# Altium PCB Current_Sense_Board_V1.PcbDoc
Units mil, origin at the board's own origin, x right, y up, seen from the top; angles counter-clockwise.
Board outline 2677.17 x 2677.17 mil, 2 copper layers (Top Layer, Bottom Layer); 55 components, 30 nets, 223 pads, 61 vias.
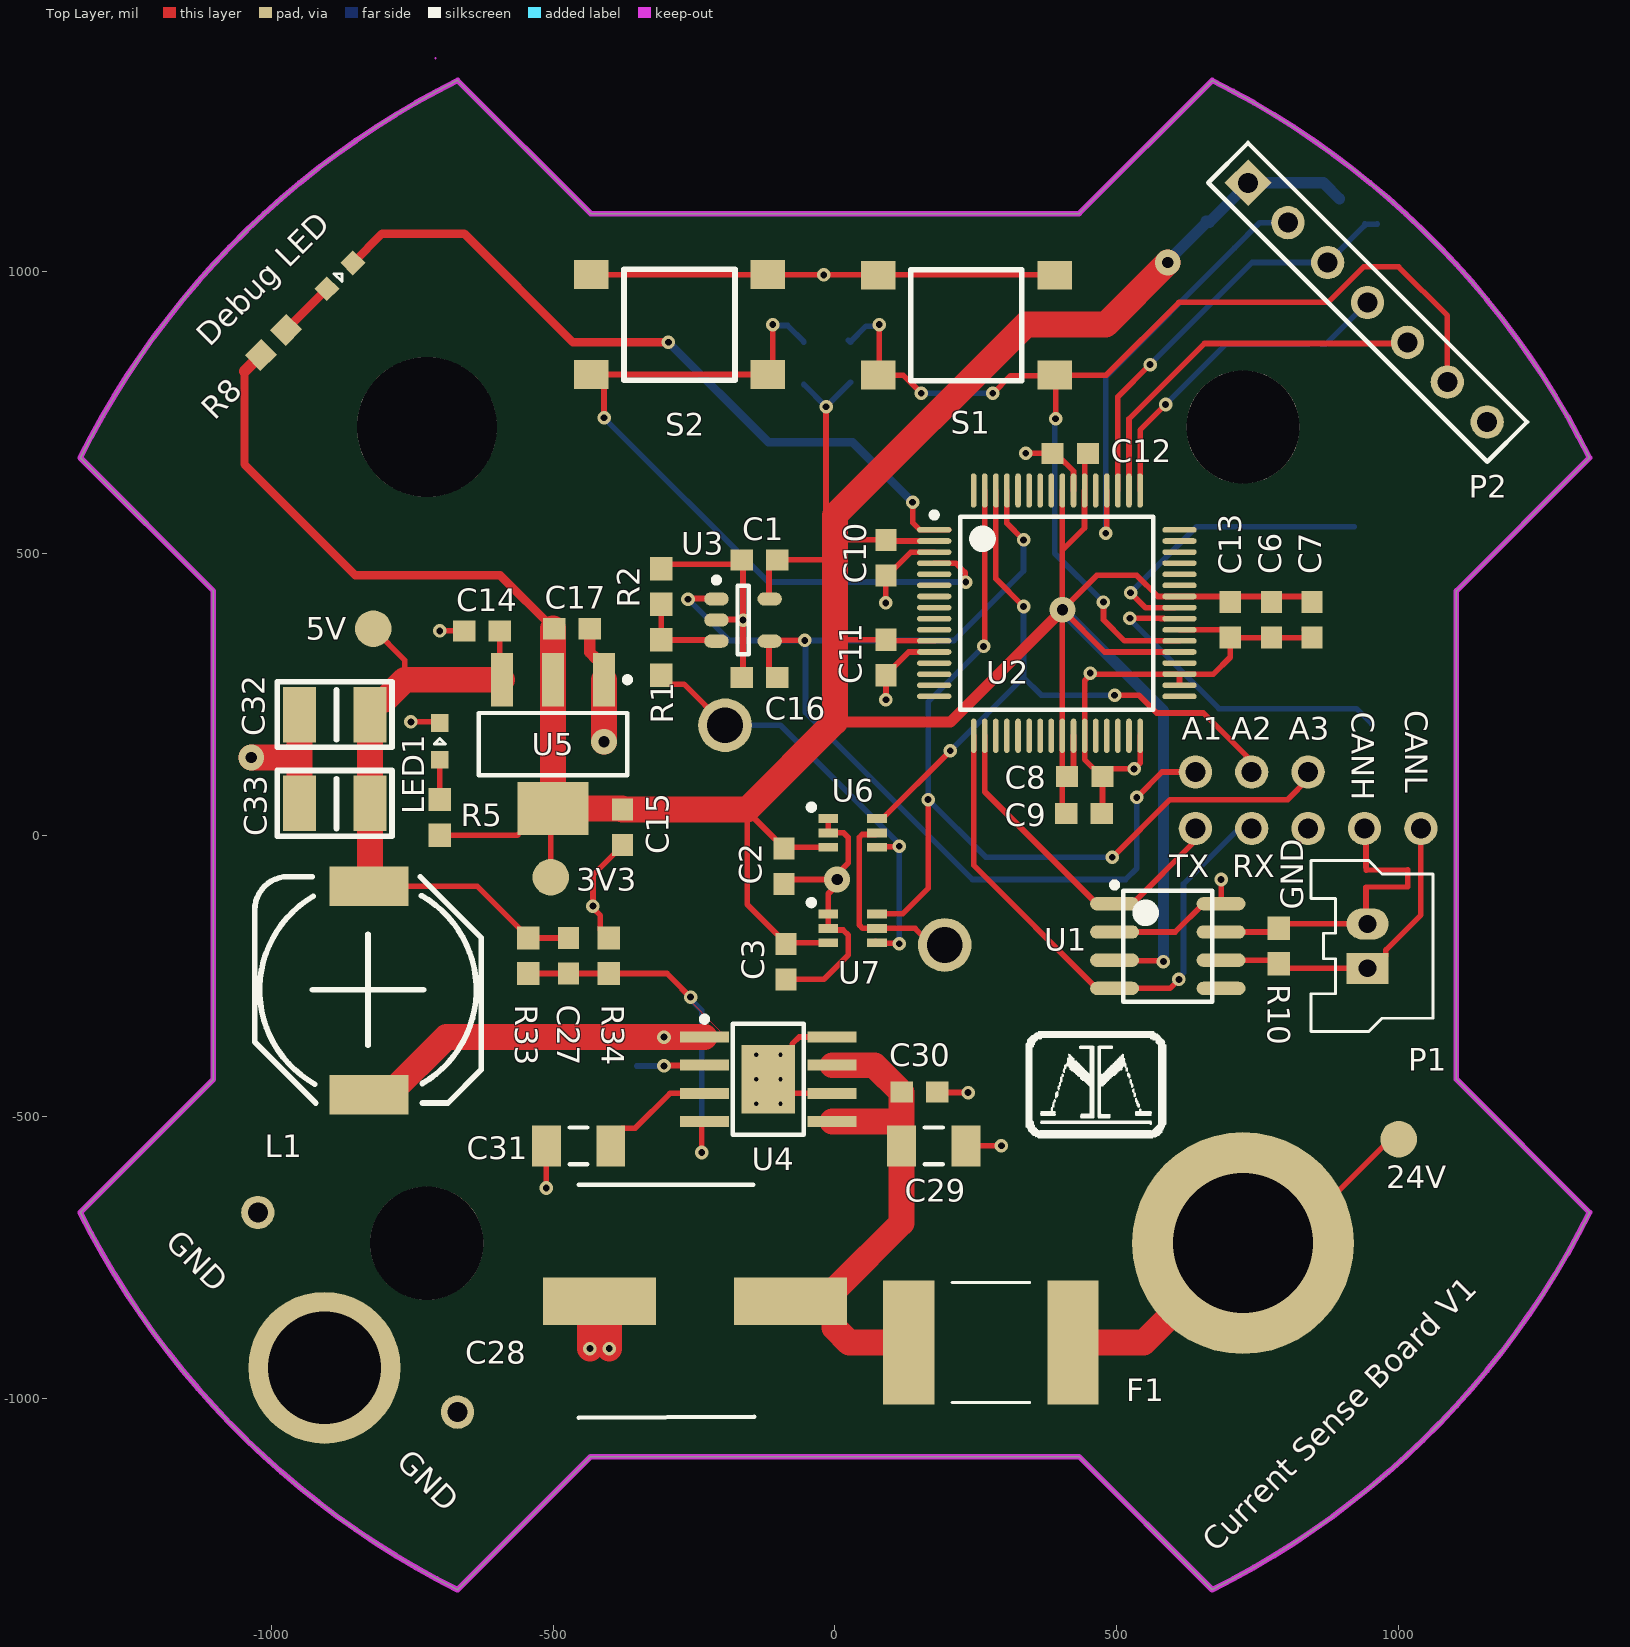
[diagram p0: Top Layer view]
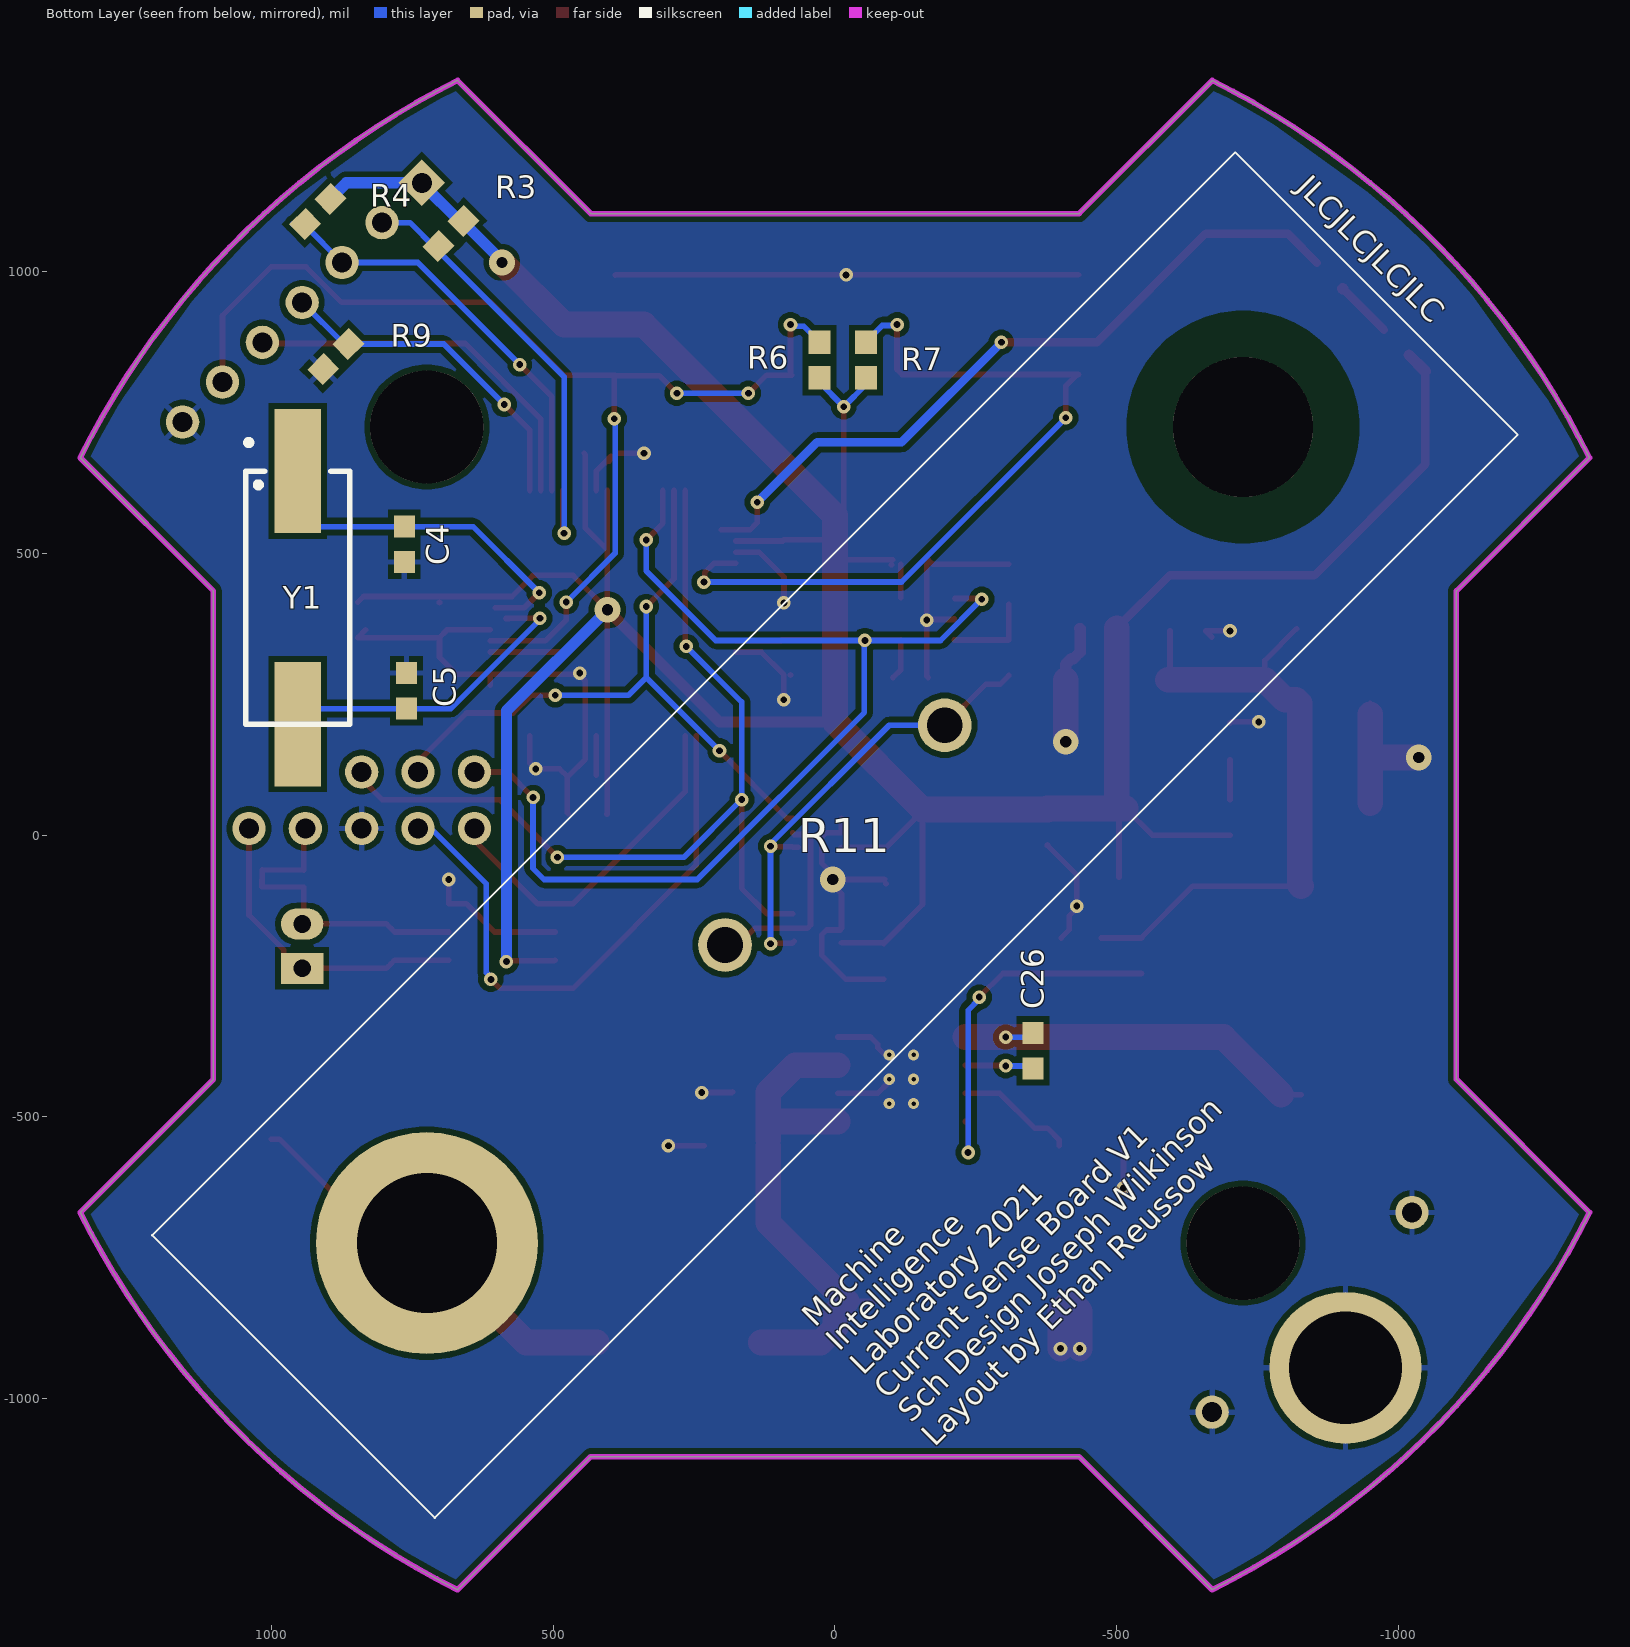
[diagram p1: Bottom Layer view, seen from below]

## Layer stack, top to bottom
Top Solder: solder mask 0.4, Solder Resist, Dk 3.5
Top Layer: signal copper 1.4
Dielectric 1: dielectric 12.6, FR-4, Dk 4.8
Bottom Layer: signal copper 1.4
Bottom Solder: solder mask 0.4, Solder Resist, Dk 3.5

## Board outline
-1338.58,-669.29 -1102.36,-433.07 -1102.36,433.07 -1338.58,669.29 cw(c0,0) -669.29,1338.58 -433.07,1102.36 433.07,1102.36 669.29,1338.58 cw(c0,0) 1338.58,669.29 1102.36,433.07 1102.36,-433.07 1338.58,-669.29 cw(c0,0) 669.29,-1338.58 433.07,-1102.36 -433.07,-1102.36 -669.29,-1338.58 cw(c0,0)

## Design rules (kind name [scope] priority, off if disabled: settings)
BoardOutlineClearance [All] p1: gap=7.87 ignorepadtopadclearanceinfootprint=FALSE
Clearance [All] p1: gap=10 ignorepadtopadclearanceinfootprint=FALSE except(0: Arc-Hole Track-Hole SMDPad-Hole THPad-Hole Via-Hole Fill-Hole Poly-Hole Region-Hole Text-Hole; 5: Track-Track SMDPad-SMDPad; 5.91: SMDPad-Text; 7.87: Track-SMDPad; 12.99: Track-THPad; 19.68: THPad-THPad)
HoleSize [All] p1: absolutevalues=TRUE maxlimit=248.03 minlimit=7.87 maxpercent=80.000 minpercent=20.000
HoleToHoleClearance [All] p1: gap=19.68 allowstackedmicrovias=TRUE
MinimumAnnularRing [All] p1: minimumring=5.12
MinimumSolderMaskSliver [All] p1: minsoldermaskwidth=0
PolygonConnect PolygonConnect_GND [InNet('GND')] p1: thpad.connectstyle=Relief thpad.reliefconductorwidth=10 thpad.reliefentries=4 thpad.polygonreliefangle="90 Angle" thpad.airgapwidth=10 smdpad.connectstyle=Relief smdpad.reliefconductorwidth=10 smdpad.reliefentries=4 smdpad.polygonreliefangle="90 Angle" smdpad.airgapwidth=10 via.connectstyle=Direct via.reliefconductorwidth=10 via.reliefentries=4 via.polygonreliefangle="90 Angle" via.airgapwidth=10
PolygonConnect PolygonConnect_NPTH [InNet('No Net')] p2: thpad.connectstyle=NoConnect thpad.reliefconductorwidth=10 thpad.reliefentries=4 thpad.polygonreliefangle="90 Angle" thpad.airgapwidth=393.7 smdpad.connectstyle=NoConnect smdpad.reliefconductorwidth=10 smdpad.reliefentries=4 smdpad.polygonreliefangle="90 Angle" smdpad.airgapwidth=10 via.connectstyle=NoConnect via.reliefconductorwidth=10 via.reliefentries=4 via.polygonreliefangle="90 Angle" via.airgapwidth=10
PolygonConnect PolygonConnect_ALL [All] p3: connectstyle=Relief reliefconductorwidth=10 reliefentries=4 polygonreliefangle="90 Angle" airgapwidth=10
RoutingVias [All] p1: holewidth=12.01 width=24.02 viastyle="Through Hole" minholewidth=7.87 minwidth=15.75 maxholewidth=248.03 maxwidth=496.06
SilkToSilkClearance [All] p1: silktosilkclearance=0
SilkToSolderMaskClearance [IsPad] p1 off: minsilkscreentomaskgap=10 clearancetoexposedcopper=TRUE
SolderMaskExpansion [All] p1: expansion=4 istentingtop=FALSE
UnRoutedNet [All] p1: checkbadconnections=TRUE
Width [All] p1: maxlimit=236.22 minlimit=5 preferedwidth=10 minimp=50.000000 maximp=50.000000 favimp=50.000000
24 further rules are at their usual default settings.

## Classes and differential pairs
component class TivaC: C1 C2 C3 C4 C5 C16 "Debug LED" LED1 P1 P2 R1 R2 R3 R4 R5 R6 R7 R8 R9 R10 S1 S2 U1 U2 U3 U6 U7 Y1
component class Power: C6 C7 C8 C9 C10 C11 C12 C13 C14 C15 C17 C26 C27 C28 C29 C30 C31 C32 C33 F1 L1 R33 R34 U4 U5

## Components (designator, comment, footprint, x,y, rotation, side; value= is the part's Value field where it differs from the comment)
C1 "Cap" CAPC0603 -133.86,488.19 r0 top value=1uF
C2 "Cap" CAPC0603 -90.55,-55.12 r270 top value=0.1uF
C3 "Cap" CAPC0603 -86.61,-224.41 r270 top value=0.1uF
C4 "Cap" CAPC0603 763.78,515.75 r270 bottom value=10pF
C5 "Cap" CAPC0603 759.84,255.91 r90 bottom value=10pF
C6 "Cap" CAPC0603 774.54,381.75 r270 top value=0.1uF
C7 "Cap" CAPC0603 846.2,381.75 r270 top value=0.1uF
C8 "Cap" CAPC0603 443.07,103.67 r0 top value=0.1uF
C9 "Cap" CAPC0603 441.74,37.99 r0 top value=0.1uF
C10 "Cap" CAPC0603 90.55,492.13 r270 top value=0.1uF
C11 "Cap" CAPC0603 90.55,314.96 r270 top value=0.1uF
C12 "Cap" CAPC0603 417.32,677.17 r180 top value=0.1uF
C13 "Cap" CAPC0603 701.25,381.75 r270 top value=1.0uF
C14 "Cap" CAPC0603 -625.98,362.2 r180 top value=1uF
C15 "Cap" CAPC0603 -377,13.9 r270 top value=1uF
C16 "Cap" CAPC0603 -133.86,279.53 r180 top value=100nF
C17 "Cap" CAPC0603 -466.48,366.02 r0 top value=1uF
C26 "Cap" CAPC0603 -351.49,-382.26 r90 bottom value=470nF
C27 "Cap" CAPC0603 -472.44,-213.92 r270 top value=75pF
C28 "MAL215097101E3" MAL215097101E3 -248.03,-826.77 r180 top value=100uF
C29 "Cap" CAPC1206 175.2,-551.18 r0 top value=10uF
C30 "Cap" CAPC0603 150.15,-455.67 r0 top value=100nF
C31 "Cap" CAPC1206 -454.72,-551.18 r180 top value=10uF
C32 "Cap" CAP1210 -823.71,213.79 r0 top value=47uF
C33 "Cap" CAP1210 -823.71,56.31 r0 top value=47uF
"Debug LED" "LED" LED0603 -877.95,992.13 r45 top (schematic designator LED2)
F1 "PTC Fuse" PTC7451X11N 276.64,-900.16 r180 top value=1.1A
GND "Hole_5.08mm" HOLE_5_08mm -905.51,-944.88 r0 top (schematic designator J2)
L1 "MSS1048-563MLB" MSS1048-563MLB -826.77,-275.59 r180 top value=56uH
LED1 "LED" LED0603 -700.79,166.34 r90 top
P1 "2-pin Vert Sherlock" MOLEX-HDR-1X2-SHERLOCK-VERT 944.88,-236.22 r270 top
P2 "Header 7" HDR1X7 732.75,1157.01 r315 top
R1 "Res" RES0603 -308.13,314.96 r90 top value=100k
R2 "Res" RES0603 -308.13,440.94 r90 top value=10k
R3 "Res" RES0603 681.1,1066.93 r315 bottom value=10k
R4 "Res" RES0603 917.32,1106.3 r135 bottom value=10k
R5 "Res" RES0603 -700.79,31.5 r90 top value=1k
R6 "Res" RES0603 27.56,842.52 r90 bottom value=10k
R7 "Res" RES0603 -55.12,842.52 r90 bottom value=10k
R8 "Res" RES0603 -996.06,874.02 r45 top value=1k
R9 "Res" RES0603 885.25,848.8 r315 bottom value=10k
R10 "Res" RES0603 787.4,-196.85 r90 top value=120
R11 "SH6918F500BPEP" SH6918F500BPEP 0,0 r315 bottom
R33 "Res" RES0603 -543.76,-213.92 r270 top value=40.2k
R34 "Res" RES0603 -401.28,-213.92 r90 top value=10k
S1 "Button" PTS645xxxxSMTR92 233.26,904.57 r180 top
S2 "Button" PTS645xxxxSMTR92 -275.59,905.51 r180 top
U1 "SN65HVD230" SOIC-8pin 590.55,-196.85 r0 top
U2 "TM4C123GH6PMT7R" TM4C123GH6PMT7R_L 393.7,393.7 r0 top value=Value
U3 "MCP6L01" MCP6L01R -162.91,381.47 r0 top
U4 "LMR23610ADDAR" LMR23610ADDAR -118.11,-433.07 r0 top
U5 "TLV1117LV30DCYR" SOT23-4N -500,161.42 r270 top
U6 "INA190" "SC70 (DCK)" -11.81,29.53 r0 top
U7 "INA190" "SC70 (DCK)" -11.81,-139.76 r0 top
Y1 "ABLS2-12.000MHZ-D4Y-T" HC49/US 952.76,421.26 r270 bottom

## Footprints (in the part's own frame and the unit in brackets; to place one, negate y for a bottom-side part, rotate by r counter-clockwise, add the part's x,y. Pads: shape width x height; smd on the part's side, far side on the other; paste and mask are expansions set on the pad)
CAP1210 [mm]
  rect 1.5x2.5 smd: 1(-0.02,0) 2(-3.2,0)
  silkscreen extent -4.2,-1.48 0.97,1.48, body extent -3.22,-1.25 0,1.26, height 2.5
CAPC0603 [mm] "Chip Capacitor, 2-Leads, Body 1.60x0.80mm, IPC Medium Density"
  rect 1x0.95 smd: 1(-0.8,0) 2(0.8,0)
  body extent -0.88,-0.48 0.87,0.48, height 0.8
CAPC1206 [mm] "Chip Capacitor, 2-Leads, Body 3.20x1.60mm, IPC Medium Density"
  rect 1.3x1.85 smd: 1(-1.45,0) 2(1.45,0)
  silkscreen extent -0.4,-0.82 0.4,0.82, body extent -1.7,-0.9 1.7,0.9, height 1.8
HC49/US [mm]
  rect 5.6x2.1 smd: 1(-5.7,0) 2(5.7,0)
  silkscreen extent -7.11,-2.35 5.7,2.35, body extent -6.35,-2.35 6.35,2.35, height 3.16
HDR1X7 [mm] "Connector; Header; 7 Position"
  rect 1.5x1.5 hole 0.9: 1(0,0)
  round 1.5 hole 0.9: 2(2.54,0) 3(5.08,0) 4(7.62,0) 5(10.16,0) 6(12.7,0) 7(15.24,0)
  silkscreen extent -1.27,-1.27 16.51,1.27
HOLE_5_08mm [mm]
  round 6.85 hole 5.08: 1(0,0)
LED0603 [mm] "Chip LED, 2-Leads, Body 1.60x0.80mm, IPC Medium Density"
  rect 0.8x0.8 smd: A(-0.825,0) C(0.825,0)
  silkscreen extent -0.13,-0.25 0.12,0.25, body extent -0.88,-0.48 0.88,0.47, height 0.8
LMR23610ADDAR [mm] "IC REG BUCK ADJ 1A SYNC 8SOPWRPD"
  rect 2.2x0.5 smd: 1(-2.875,1.905) 2(-2.875,0.635) 3(-2.875,-0.635) 4(-2.875,-1.905) 5(2.875,-1.905) 6(2.875,-0.635) 7(2.875,0.635) 8(2.875,1.905)
  rect 2.4x3.1 smd: 9(0,0)
  silkscreen extent -3,-2.5 1.6,2.83, body extent -2,-2.5 2,2.5, height 1.7
MAL215097101E3 [mm]
  rect 5.1x2.15 smd: 1(-4.3,0) 2(4.3,0)
  silkscreen extent -2.67,-5.25 5.25,5.25, body extent -6.05,-5.25 6.05,5.25, height 10.5
MCP6L01R [mm] "SOT23, 5-Leads, Body 2.90x2.70mm, Pitch 0.95mm, IPC Medium Density"
  oval 1.1x0.6 smd: 1(-1.2,0.95) 2(-1.2,0) 3(-1.2,-0.95) 4(1.2,-0.95) 5(1.2,0.95)
  silkscreen extent -1.32,-1.55 0.25,1.92, body extent -0.9,-1.55 0.9,1.55, height 1.45
MOLEX-HDR-1X2-SHERLOCK-VERT [mm]
  rect 1.397x1.905 hole 0.8: 1(0,0)
  oval 1.397x1.905 hole 0.8: 2(-2,0)
  silkscreen extent -4.85,-2.55 2.85,2.95, body extent -4.87,-2.59 2.83,2.96, height 8.5
MSS1048-563MLB [mm] "FIXED IND 56UH 1.7A 126 MOHM"
  rect 3.56x1.78 smd: 1(0,4.7) 2(0,-4.7)
  silkscreen extent -5.06,-5.13 5.14,5.07, body extent -5.1,-5.15 5.1,5.15, height 5
PTC7451X11N [mm] "Chip PTC, 2920, 7351 metric 2-Leads, Body 7.36x5.12mm, IPC Medium Density"
  rect 2.3x5.6 smd: 1(-3.7,0) 2(3.7,0)
  silkscreen extent -1.75,-2.7 1.75,2.7, body extent -3.99,-2.72 3.99,2.72, height 1.15
PTS645xxxxSMTR92 [mm] "PTS645 Series SMT 6 mm Tactile Switch"
  rect 1.555x1.3 smd: A(-3.975,2.25) A(3.975,2.25) B(-3.975,-2.25) B(3.975,-2.25)
  silkscreen extent -2.5,-2.5 2.5,2.5, body extent -3,-3 3,3, height 4.5
RES0603 [mm] "Chip Resistor, 2-Leads, Body 1.60x0.80mm, IPC Medium Density"
  rect 1.05x1 smd: 1(-0.8,0) 2(0.8,0)
  body extent -0.88,-0.48 0.87,0.47, height 0.8
"SC70 (DCK)" [mm] "6 pin"
  rect 0.9x0.4 smd mask+0.05: 1(0,0) 2(0,-0.65) 3(0,-1.3) 4(2.2,-1.3) 5(2.2,-0.65) 6(2.2,0)
  silkscreen extent -0.89,0.38 -0.64,0.63
SH6918F500BPEP [mm]
  round 2.415 hole 1.61: 1(-7,0) 2(7,0)
  round 6.3 hole 6.3 unplated: MH1(-26,0)
  round 10 hole 6.3: MH2(26,0)
  silkscreen extent -34.5,-9 34.5,9, body extent -34.5,-9 34.5,9, height 3.3
SOIC-8pin [mm] "For 296-1345-1-ND"
  oval 2.2x0.6 smd: 1(-2.4,1.905) 2(-2.4,0.635) 3(-2.4,-0.635) 4(-2.4,-1.905) 5(2.4,-1.905) 6(2.4,-0.635) 7(2.4,0.635) 8(2.4,1.905)
  silkscreen extent -2.52,-2.5 2,2.88, body extent -2,-2.5 2,2.5, height 1.75
SOT23-4N [mm] "SOT223, 4-Leads, Body 6.50x7.00mm (avg), Pitch 2.30mm, IPC Medium Density"
  rect 2.4x1 smd: 1(-2.9,2.3) 2(-2.9,0) 3(-2.9,-2.3)
  rect 2.4x3.2 smd: 4(2.9,0)
  silkscreen extent -3.02,-3.35 1.4,3.48, body extent -1.85,-3.35 1.85,3.35, height 1.7
TM4C123GH6PMT7R_L [mm]
  oval 1.55x0.25 smd paste-0.102 mask+0.051: 1(-5.525,3.75) 2(-5.525,3.25) 3(-5.525,2.75) 4(-5.525,2.25) 5(-5.525,1.75) 6(-5.525,1.25) 7(-5.525,0.75) 8(-5.525,0.25) 9(-5.525,-0.25) 10(-5.525,-0.75) 11(-5.525,-1.25) 12(-5.525,-1.75) 13(-5.525,-2.25) 14(-5.525,-2.75) 15(-5.525,-3.25) 16(-5.525,-3.75) 33(5.525,-3.75) 34(5.525,-3.25) 35(5.525,-2.75) 36(5.525,-2.25) 37(5.525,-1.75) 38(5.525,-1.25) 39(5.525,-0.75) 40(5.525,-0.25) 41(5.525,0.25) 42(5.525,0.75) 43(5.525,1.25) 44(5.525,1.75) 45(5.525,2.25) 46(5.525,2.75) 47(5.525,3.25) 48(5.525,3.75)
  oval 0.25x1.55 smd paste-0.102 mask+0.051: 17(-3.75,-5.525) 18(-3.25,-5.525) 19(-2.75,-5.525) 20(-2.25,-5.525) 21(-1.75,-5.525) 22(-1.25,-5.525) 23(-0.75,-5.525) 24(-0.25,-5.525) 25(0.25,-5.525) 26(0.75,-5.525) 27(1.25,-5.525) 28(1.75,-5.525) 29(2.25,-5.525) 30(2.75,-5.525) 31(3.25,-5.525) 32(3.75,-5.525) 49(3.75,5.525) 50(3.25,5.525) 51(2.75,5.525) 52(2.25,5.525) 53(1.75,5.525) 54(1.25,5.525) 55(0.75,5.525) 56(0.25,5.525) 57(-0.25,5.525) 58(-0.75,5.525) 59(-1.25,5.525) 60(-1.75,5.525) 61(-2.25,5.525) 62(-2.75,5.525) 63(-3.25,5.525) 64(-3.75,5.525)
  silkscreen extent -5.65,-4.35 4.35,4.55, body extent 0,0 0.25,0.25, height 0.25

## Part data
C1 C2 C3 C4 C5 C6 C7 C8 C9 C10 C11 C12 C13 C14 C15 C16 C17 C30: Supplier Part Number 1=1276-1000-1-ND, Supplier 1=Digi-Key
C32 C33: Supplier Part Number 1=490-6538-1-ND, Supplier 1=Digi-Key
"Debug LED": Color=Blue, Supplier Part Number 1=754-1122-1-ND, Supplier 1=Digi-Key
F1: library part PTC_Fuse, Supplier Part Number 1=507-1744-1-ND, Supplier 1=Digi-Key
L1: "FIXED IND 56UH 1.7A 126 MOHM", Manufacturer 1=Coilcraft, ComponentLink1Description="Web Site", ComponentLink1URL=https://www.coilcraft.com/mss1048.cfm, Manufacturer Part Number 1=MSS1048-563MLB, Supplier 1=Coilcraft, Supplier Part Number 1=MSS1048-563MLB
LED1: Color=Green, Supplier Part Number 1=754-1122-1-ND, Supplier 1=Digi-Key
P1: library part MOLEX-HDR-1x2-SHERLOCK_VERT, "Header, Molex, 2mm Pitch Sherlock Header, Single Row, Vertical, 2 Circuits, Length 3.3mm, 0353620250"
P2: "Header, 7-Pin", LatestRevisionDate=17-Jul-2002, LatestRevisionNote="Re-released for DXP Platform.", Publisher="Altium Limited"
R1 R2 R3 R4 R5 R6 R7 R8 R9 R10 R33 R34: Supplier Part Number 1=RMCF0603JT10K0CT-ND, Supplier 1=Digi-Key
R11: "Copper bus bar with shunt resistor integrated", Manufacturer_Name=Ohmite, Mouser Part Number=588-SH6918F500BPEP, Height=3.2mm, Manufacturer_Part_Number=SH6918F500BPEP, Mouser Price/Stock=https://www.mouser.co.uk/ProductDetail/Ohmite/SH6918F500BPEP?qs=GedFDFLaBXHzBT0hI2BMgQ%3D%3D
S1 S2: "SPST Button", Supplier Part Number 1=CKN9087CT-ND, Supplier 1=Digi-Key
U1: "3.3V CAN Bus Transceiver"
U2: "Imported", Alternate_PartNumber=TM4C123GH6PMT, Manufacturer="Texas Instruments", PartNumber=TM4C123GH6PMTR, CompType=IC, MountType=SMT, PackageReference=PM0064A, PIN_COUNT=64, RefDes=RefDes, RoHS=Y, TYPE=TYPE
U3: "Op Amp Rail-to-Rail 1Mhz", Supplier Part Number 1=MCP6L01T-E/OTCT-ND, Supplier 1=Digi-Key
U4: "IC REG BUCK ADJ 1A SYNC 8SOPWRPD", Manufacturer 1="Texas Instruments", Supplier Part Number 1=296-47267-1-ND, ComponentLink1Description=Datasheet, ComponentLink1URL=http://www.ti.com/lit/ds/symlink/lmr23610.pdf, ComponentLink2Description="Web Site", ComponentLink2URL=http://www.ti.com/product/LMR23610/description, Manufacturer Part Number 1=LMR23610ADDAR, Supplier 1=Digi-Key
Y1: "12MHz ±30ppm Crystal 18pF 50 Ohm -40°C ~ 85°C Surface Mount HC49/US", Supplier Part Number 1=535-9869-1-ND, Supplier 1=Digi-Key
C26 C27 C29 C31: Supplier 1=Digi-Key

## Free pads (board coordinates)
  round 59.06 hole 35.43: 10(-1023.62,-669.29) 11(-669.29,-1023.62) 19(1039.37,11.81) 20(939.37,11.81) 21(839.37,11.81) 21(839.37,111.81) 22(739.37,11.81) 23(639.37,11.81) 25(639.37,111.81) 26(739.37,111.81)
  round 64.75 smd: 12(-818.9,366.14) 12(-503.94,-74.8) 12(1000,-539.37)
  round 200.79 hole 200.79 unplated: MH2(723.81,723.81) MH3(-723.81,-723.81)

## Via types
v1: diameter 24.02, hole 12.01, Top Layer to Bottom Layer, 39 vias
v2: diameter 24, hole 12, Top Layer to Bottom Layer, 11 vias
v3: diameter 19.68, hole 7.87, Top Layer to Bottom Layer, 6 vias
v4: diameter 45.67, hole 20, Top Layer to Bottom Layer, 5 vias

## Nets (pads, with @x,y where several pads share a name; then routed paths per layer and width w, separated by ;. In a path a pad name is that pad's centre, name@x,y a point inside that pad or via, vN(x,y) a via of type N, cw(c..) or ccw(c..) an arc to the next point about the centre after c; other vN are vias at no path point)
3V3: C1.2 C2.1 C3.1 C6.1 C7.1 C8.1 C9.1 C10.1 C11.1 C12.1 C13.1 C15.1 C17.1 P2.1 pad.12@-503.94,-74.8 R3.1 R4.2 R5.1 R6.1 R7.1 R8.1 U1.3 U2.2 U2.11 U2.25 U2.26 U2.37 U2.42 U2.54 U2.56 U3.5 U5.2 U5.4 U6.3 U7.3 | length 7837.3
  Top Layer w10: R5.1 -562.99,0 U5.4@-515.75,47.24 ; pad.12@-503.94,-74.8 -503.94,43.31 U5.4 ; -155.39,45.4 -155.39,42.2 ; U3.5@-117,420.98 C1.2@-117,480.31 ; C1.2 -4.21,488.19 -3.99,488.41 ; C1.2@-100.94,479.38 C1.2@-99.95,479.38 ; v1(-15.75,759.84) -15.75,538.16 -1.49,523.9 ; U7.3 -84.65,-190.94 C3.1 -86.61,-191.93 -155.39,-123.15 -155.39,42.2 ; U6.3 -91.54,-21.65 -155.39,42.2 ; -0.99,524.4 -0.21,523.62 0,523.62 C10.1 92.52,521.65 U2.2 ; 0,336.61 9.84,346.46 C11.1 ; C11.1@93.81,346.22 95.54,344.49 U2.11 ; U2.56 403.54,505.41 ; C9.1@404.39,36.99 403.54,37.84 U2.25 v4(403.54,399.61) ; U2.26 423.23,106.05 C8.1@423.34,105.94 ; C12.1@444.88,677.17 442.91,675.2 U2.54 442.83,611.14 442.83,544.7 403.54,505.41 ; U1.3 497.34,-223.13 581.4,-223.13 v1(582.68,-224.41) ; U2.37 478.35,324.8 v4(403.54,399.61) ; C13.1@701.25,412.26 C13.1 ; C7.1 836.22,423.23 572.83,423.23 535.43,460.63 464.57,460.63 v4(403.54,399.61) ; v4(403.54,399.61) 403.54,505.41
  Top Layer w15: -1047.24,822.83 -1047.24,657.48 -850.39,460.63 -593.57,460.63 C17.1@-500,367.06
  Top Layer w20: -1047.24,822.83 R8.1 ; 0,200.79 204.72,200.79 v4(403.54,399.61)
  Top Layer w45.67: U5.4@-515.75,47.24 U5.4 ; C17.1@-500,367.06 U5.2 U5.4 ; C15.1 -155.39,45.4 0,200.79 0,336.61 0,523.62 0,566.93 338.58,905.51 480.31,905.51 v4(590.55,1015.75) ; C15.1@-377,47.24 U5.4
  Bottom Layer w10: R7.1@-55.12,799.21 v1(-15.75,759.84) R6.1@27.56,803.15
  Bottom Layer w20: v4(403.54,399.61) 582.68,220.47 v1(582.68,-224.41) ; v4(590.55,1015.75) 590.55,1018.33 658.83,1086.61 R3.1 ; R3.1@664.28,1087.26 732.75,1155.73 P2.1 866.61,1157.01 R4.2
5V: C14.1 C27.1 C32.1 C33.1 L1.2 pad.12@-818.9,366.14 R33.1 U5.3 | length 1171.4
  Top Layer w10: L1.2 -634.65,-90.55 -543.76,-181.44 R33.1 C27.1 ; pad.12@-818.9,366.14 -762.7,309.94 -762.7,275.59 ; C14.1 -594.49,279.53 U5.3
  Top Layer w45.67: L1.2 -824.5,-88.28 C33.1 C32.1 -824.5,233.47 -817.81,240.16 -798.12,240.16 -762.7,275.59 U5.3
24V: F1.1 pad.12@1000,-539.37 R11.MH2 | length 727.1
  Top Layer w10: R11.MH2 800.74,-723.81 985.18,-539.37 pad.12@1000,-539.37
  Top Layer w45.67: F1.1 547.46,-900.16 R11.MH2
ADC_IN1: C16.1 pad.25 U2.61 U3.1 U3.4 | length 2114
  Top Layer w10: v1(-260.55,418.51) -259.31,419.74 U3.1@-212.72,419.74 ; C16.1 -103.3,279.53 -117,293.23 -117,346.18 -116.52,345.7 -53.82,345.7 v1(-53.34,345.22) ; U2.61 305.12,553.15 v1(334.65,523.62) ; v1(535.43,66.93) 580.31,111.81 pad.25
  Bottom Layer w10: v1(-260.55,418.51) -187.26,345.22 v1(-53.34,345.22) ; v1@-51.1,342.98 v1@-52.22,344.1 ; v1(334.65,523.62) 334.65,468.5 211.36,345.22 v1(-53.34,345.22) ; v1(535.43,66.93) 535.43,-59.06 515.75,-78.74 244.09,-78.74 -52.22,217.57 v1@-52.22,344.1 ; v1(-53.34,345.22) v1@-52.22,344.1
ADC_IN2: pad.26 U2.62 U6.6 | length 1204.5
  Top Layer w10: U6.6 84.65,29.53 v1(204.72,149.61) ; U2.62 285.43,454.72 v1(334.65,405.51) v1@331.96,402.83 ; v1(496.06,248.03) 539.37,248.03 570.87,216.54 653.54,216.54 729.98,140.09 729.98,121.2 pad.26
  Bottom Layer w10: v1(204.72,149.61) 334.65,279.53 ; v1(334.65,405.51) 334.65,279.53 ; v1(496.06,248.03) 366.14,248.03 334.65,279.53
ADC_IN3: pad.21@839.37,111.81 U2.63 U7.6 | length 1643
  Top Layer w10: U7.6 120.08,-139.76 165.35,-94.49 v1(165.35,62.99) ; v1(263.78,334.65) 265.67,336.54 265.67,611.14 U2.63 ; v1(492.13,-39.37) 594.49,62.99 803.15,62.99 839.37,99.21 pad.21@839.37,111.81
  Bottom Layer w10: v1(263.78,334.65) 165.35,236.22 v1(165.35,62.99) 267.72,-39.37 v1(492.13,-39.37)
CAN_RX: pad.22 U1.4 U2.17 | length 1025.4
  Top Layer w10: U2.17 246.06,-53.35 464.57,-271.85 U1.4 594.29,-271.85 v1(610.24,-255.91)
  Bottom Layer w10: v1(610.24,-255.91) 610.24,-252.11 618.29,-244.06 618.29,-86.43 716.54,11.81 pad.22
CAN_TX: pad.23 U1.1 U2.18 | length 603
  Top Layer w10: U2.18 265.75,76.97 464.57,-121.85 U1.1 527.56,-121.85 637.8,-11.61 pad.23@637.8,-7.87
CANH: P1.2 pad.20 R10.2 U1.7 | length 593.3
  Top Layer w10: U1.7 780.91,-171.85 R10.2 795.28,-157.48 P1.2 942.13,-154.72 942.13,-122.22 942.13,-92.3 1016.26,-91.76 1016.04,-61.76 942.17,-62.3 942.13,-56.44 942.13,-51.44 942.13,16.93 pad.20@939.37,19.69
CANL: P1.1 pad.19 R10.1 U1.6 | length 543.1
  Top Layer w10: U1.6 780.91,-221.85 R10.1 795.28,-236.22 P1.1 954.88,-236.22 977.38,-213.72 977.38,-203.72 1039.37,-141.73 pad.19@1039.37,-3.94
DBG_LED_n: "Debug LED.C" U2.1 | length 1317
  Top Layer w10: v1(137.8,590.55) 137.8,554.29 150.75,541.34 U2.1 U2.1@201.61,541.34
  Top Layer w15: -854.99,1015.09 -803.15,1066.93 -657.48,1066.93 -464.57,874.02 v1(-295.28,874.02)
  Bottom Layer w15: v1(-295.28,874.02) -118.11,696.85 31.5,696.85 v1(137.8,590.55)
DBG_SW_n: R7.2 S2.A U2.4 | length 1400.9
  Top Layer w10: S2.A@-432.09,816.93 S2.A@-430.04,816.93 ; v1(-409.45,740.16) -409.45,796.34 S2.A@-430.04,816.93 ; v1(-110.24,905.51) -110.24,825.79 -119.09,816.93 S2.A@-430.04,816.93 ; U2.4 214.57,482.28 231.06,465.79 231.06,450.04 v1(232.28,448.82)
  Bottom Layer w10: v1(-409.45,740.16) -118.11,448.82 v1(232.28,448.82) ; v1(-110.24,905.51) -108.55,903.83 -83.95,903.83 -55.12,875 R7.2
GND: C1.1 C2.2 C3.2 C4.2 C5.2 C6.2 C7.2 C8.2 C9.2 C10.2 C11.2 C12.2 C13.2 C14.2 C15.2 C16.2 C17.2 C28.2 C29.2 C30.2 C31.2 C32.2 C33.2 GND.1 LED1.C P2.7 pad.10 pad.11 pad.21@839.37,11.81 R2.2 R9.2 R34.2 S1.B S2.B U1.2 U1.8 U2.3 U2.12 U2.27 U2.32 U2.34 U2.35 U2.39 U2.55 U3.2 U4.6 U4.8 U4.9 U5.1 U6.1 U6.2 U7.1 U7.2 | length 4789.3
  Top Layer w10: C32.2 C32.2@-949.7,233.47 ; v1(-751.97,200.79) -702.76,200.79 LED1.C ; v1(-700.79,362.2) C14.2 C14.2@-668.29,351.39 ; v2(-511.81,-625.98) C31.2 ; S2.B@-432.09,994.09 -119.09,994.09 388.81,994.09 S1.B@389.76,993.15 ; R34.2 -415.97,-167.74 -415.97,-142.94 -429.13,-129.77 v2(-429.13,-125.98) -429.13,-70.71 -377,-18.58 C15.2 ; R2.2@-308.13,480.31 -173.23,480.31 C1.1 ; U3.2@-211.49,383.58 -210.43,382.53 -163.97,382.53 v2(-162.91,381.47) ; C16.2 -162.91,281.97 v2(-162.91,381.47) ; C1.1@-162.91,479.35 v2(-162.91,381.47) ; v3(-96.46,-433.07) -96.46,-437.48 -75.87,-458.07 U4.6 ; v3(-96.46,-389.76) -88.58,-389.76 -75.87,-377.05 -75.87,-370.71 -63.23,-358.07 U4.8 ; C2.2@-87.93,-78.37 -87.56,-78.74 v4(3.94,-78.74) ; C3.2 -19.69,-255.91 23.62,-212.6 23.62,-177.17 14.69,-168.23 -8.94,-168.23 U7.2 U7.1 -11.81,-104.14 3.94,-88.39 v4(3.94,-78.74) ; U6.1 U6.2 15.75,3.94 23.62,-3.94 23.62,-49.4 3.94,-69.09 v4(3.94,-78.74) ; C11.2@78.74,283.46 C11.2@78.74,284.45 ; v1(90.38,411.79) 90.38,457.5 134.84,501.97 U2.3 ; v1(90.55,240.16) C11.2 90.55,284.45 130.91,324.8 U2.12 ; C30.2 182.66,-456.69 v2(236.22,-456.69) ; C29.2 v2(295.28,-551.18) ; v1(338.58,677.17) C12.2 386.81,677.17 C12.2@400.51,663.46 ; C12.2@396.81,671.98 423.23,645.56 U2.55 ; C9.2 474.57,39.32 C8.2 ; U1.2 603.54,-171.85 653.54,-121.85 U1.8 v1(685.04,-78.74) ; U2.32 541.34,127.95 v1(530.76,117.37) 488.27,117.37 C8.2 ; U2.34 U2.35 ; U2.39 687.55,364.17 701.25,350.47 C13.2 ; C7.2@832.5,364.17 846.2,350.47 C7.2 C6.2 C13.2 ; C8.2 473.58,103.67 442.91,134.34 U2.27 442.91,273.77 452.76,283.61 v1(452.76,287.4) 454.65,285.51 611.14,285.51 U2.35 ; U2.35 671.26,285.43 701.25,315.42 C13.2
  Top Layer w20: C17.2@-434,366.02 C17.2 -434.99,324.55 -423.27,312.83 -419.13,312.83 -409.45,303.15 U5.1
  Top Layer w45.67: v4(-1035.43,137.8) -952.45,137.8 -949.7,135.05 ; C33.2 -949.7,135.05 ; C32.2 -949.7,135.05 ; v1(-434.47,-910.85) -434.47,-843.92 C28.2 -400.18,-843.92 v1(-400.18,-910.85) ; v4(-409.45,165.35) U5.1
  other v1: -19.74,993.66
  other v3: -139.76,-476.38 -96.46,-476.38 -139.76,-433.07 -139.76,-389.76
NetC26_1: C26.1 U4.2 | length 120.8
  Top Layer w10: v2(-303.15,-409.45) -302.46,-408.76 -231.99,-408.76 U4.2
  Bottom Layer w10: C26.1@-351.49,-409.45 v2(-303.15,-409.45)
NetC26_2: C26.2 L1.1 U4.1 | length 686.3
  Top Layer w10: L1.1 L1.1@-791.73,-460.63
  Top Layer w45.67: L1.1@-791.73,-460.63 -689.37,-358.27 v2(-303.15,-358.27) -231.5,-358.27 U4.1
  Bottom Layer w10: C26.2@-351.49,-358.27 v2(-303.15,-358.27)
NetC27_2: C27.2 R33.2 R34.1 U4.4 | length 646
  Top Layer w10: R33.2 C27.2 R34.1 -297.89,-245.42 v2(-255.91,-287.4) ; v2(-236.22,-562.99) -236.22,-512.91 -231.38,-508.07 U4.4
  Bottom Layer w10: v2(-255.91,-287.4) -255.91,-291.19 -236.22,-310.88 v2(-236.22,-562.99)
NetC31_1: C31.1 U4.3 | length 211.2
  Top Layer w10: C31.1 -397.64,-540.35 -377.05,-519.76 -354.17,-519.76 -292.48,-458.07 U4.3
NetLED1_A: LED1.A R5.2 | length 70.9
  Top Layer w10: R5.2 LED1.A
NetLED2_A: "Debug LED.A" R8.2 | length 103.1
  Top Layer w15: R8.2 -900.92,969.16
NetR1_2: R1.2 R2.1 U3.3 | length 159.8
  Top Layer w10: R2.1 R1.2 -307.85,346.18 U3.3@-211.49,346.18
OCS0: C5.1 U2.40 Y1.2 | length 569.6
  Top Layer w10: v2(523.21,384.72) 577.05,384.72 577.68,384.09 U2.40@583.74,384.09
  Bottom Layer w10: v2(523.21,384.72) 523.21,382.3 681.1,224.41 C5.1 925.2,224.41 Y1.2
OCS1: C4.1 U2.41 Y1.1 | length 534.4
  Top Layer w10: v2(524.42,429.93) 551.04,403.31 U2.41@602.36,403.31
  Bottom Layer w10: v2(524.42,429.93) 641.73,547.24 C4.1 Y1.1@921.26,547.24
RST_N: P2.6 R6.2 S1.A U2.38 | length 2052.1
  Top Layer w10: v1(78.74,905.51) 78.74,817.96 76.77,815.99 121.02,815.99 v1(153.33,783.68) ; v1(280.14,783.57) 311.54,814.96 388.73,814.96 S1.A@389.76,815.99 ; v1(391.43,738.67) 391.43,814.32 S1.A@389.76,815.99 ; v1(476.38,413.39) 476.38,381.89 513.78,344.49 U2.38 ; P2.6 1086.3,921.57 1000,1007.87 937.94,1007.87 874.94,944.88 610.24,944.88 481.34,815.99 S1.A@389.76,815.99
  Bottom Layer w10: R6.2@23.62,877.95 R6.2 27.56,875 55.39,902.83 76.06,902.83 v1(78.74,905.51) ; v1(153.33,783.68) 153.39,783.62 v1(280.14,783.57) v1(280.14,783.57) ; v1(391.43,738.67) 389.76,737 389.76,500 v1(476.38,413.39)
SENSE+: R1.1 R11.1 U6.4 U7.4 | length 819
  Top Layer w10: R1.1 -308.13,282.48 -293.44,267.8 -267.8,267.8 R11.1 ; U6.4@64.96,-21.65 U6.4 75.79,-20.67 113.19,-20.67 v1(114.17,-19.69) ; U7.4@71.93,-188.07 U7.4 75.79,-191.93 113.19,-191.93 v1(114.17,-192.91)
  Bottom Layer w10: R11.1 -96.45,194.87 114.17,-15.75 v1(114.17,-19.69) v1(114.17,-192.91) v1@114.17,-193.66
SENSE-: R11.2 U6.5 U7.5 | length 378.2
  Top Layer w10: U6.5 71.93,1.06 48.31,1.06 43.31,-3.94 43.31,-159.5 49.16,-165.35 U7.5 142.33,-165.35 171.85,-194.87 R11.2 R11.2@179.58,-179.58
TCK/SWCLK: P2.2 R3.2 U2.52 | length 790.5
  Top Layer w10: v1(480.31,535.43) 482.2,537.32 482.2,611.14 U2.52
  Bottom Layer w10: v1(480.31,535.43) 480.31,812.92 708.82,1041.43 753.7,1086.3 P2.2
TDI: P2.5 U2.50 | length 677.2
  Top Layer w10: U2.50 521.65,738.19 655.51,872.05 1013.47,872.05 P2.5
TDO/SWO: P2.4 R9.1 U2.49 | length 605.2
  Top Layer w10: U2.49 541.34,718.5 v1(586.61,763.78)
  Bottom Layer w10: v1(586.61,763.78) 693.91,871.07 840.82,871.07 841.52,871.77 862.29,871.77 R9.1 871.07,871.07 P2.4
TMS/SWDIO: P2.3 R4.1 U2.51 | length 754.4
  Top Layer w10: U2.51 501.97,777.56 v1(559.06,834.65)
  Bottom Layer w10: v1(559.06,834.65) 740,1015.59 P2.3 939.59,1081.02 R4.1 ; R4.1@940.29,1083.33 961.06,1083.33 R4.1@961.75,1084.03
Vfused: C28.1 C29.1 C30.1 F1.2 U4.5 U4.7 | length 979.3
  Top Layer w10: C28.1 -66.31,-826.77 -20.67,-826.77 -8.39,-814.49 C28.1@3.9,-802.2 ; C29.1@97.52,-519.76 118.11,-540.35 C29.1 ; 117.91,-508.07 118.11,-507.87
  Top Layer w45.67: C28.1@-20.67,-826.77 -1.18,-846.26 -1.18,-873.41 25.57,-900.16 F1.2 ; U4.5 117.91,-508.07 ; U4.7 70.06,-408.07 118.11,-456.12 118.11,-507.87 C29.1@118.11,-540.35 ; C28.1@3.9,-802.2 118.11,-687.99 C29.1
pads on no net: R11.MH1 U1.5 U2.5 U2.6 U2.7 U2.8 U2.9 U2.10 U2.13 U2.14 U2.15 U2.16 U2.19 U2.20 U2.21 U2.22 U2.23 U2.24 U2.28 U2.29 U2.30 U2.31 U2.33 U2.36 U2.43 U2.44 U2.45 U2.46 U2.47 U2.48 U2.53 U2.57 U2.58 U2.59 U2.60 U2.64

## Polygon pours and split planes (outlines as drawn)
no net on Top Layer "NONET_L01_P006" (solid, pour order 6): -196.85,-354.33 -275.59,-275.59
GND on Bottom Layer "GND_L02_P005" (solid, remove dead copper, pour order 5): -1338.59,669.28 -1053.83,1062.63 -669.28,1338.58 -433.07,1102.36 433.07,1102.36 669.29,1338.58 1061.93,1054.55 1338.58,669.29 1102.36,433.07 1102.36,-433.07 1338.58,-669.29 1061.93,-1053.13 669.29,-1338.58 433.07,-1102.36 -433.07,-1102.36 -669.29,-1338.58 -1053.83,-1053.13 -1338.58,-669.29 -1102.36,-433.07 -1102.36,433.07

## Keep-outs
Top Layer:
  lines w3.94: -708.66,1377.95 -708.66,1377.95
Keep-Out Layer:
  the board outline again, w10

## Other copper
Bottom Layer:
  pour cut-out: -517.94,723.81 cw(c-723.81,723.81) -517.94,724.32 cw(c-519.19,724.31) -517.94,724.3 cw(c-522.96,724.3) -527.97,724.29 ccw(c-723.81,723.81) -527.97,723.81 ccw(c-723.81,723.81) -527.97,724.29 cw(c-522.96,724.3) -517.94,724.31 cw(c-712.41,723.83)

## Silkscreen, mask and mechanical layers (free items; w line width, h text height)
Top Overlay:
  drawing of 12 lines, arcs and shapes, not listed
  text "5V" at -938.83,346.15 h40
  text "CANL" at 1011.82,221.76 h40 r270
  text "CANH" at 917.01,218.98 h40 r270
  text "A1" at 615.07,168.98 h40
  text "A2" at 702.9,168.98 h40
  text "A3" at 805.26,168.98 h40
  text "TX" at 592.66,-75.11 h40
  text "RX" at 704.46,-74.53 h40
  text "3V3" at -458.83,-98.73 h40
  text "GND" at 831.02,-132.06 h40 r90
  text "24V" at 978.18,-626.29 h40
  text "GND" at -780.18,-1114.23 h40 r315
  text "Current Sense Board V1" at 675.52,-1274.01 h40 r45
Bottom Overlay:
  text "JLCJLCJLCJLC" at -816.99,1146.86 h40 r45
  text "Machine / Intelligence / Laboratory 2021 / Current Sense Board V1 / Sch Design Joseph Wilkinson / Layout by Ethan Reussow" at -177.44,-1086.89 h40 r315